# EAGLE board driverMotor (EAGLE 9.6.2)
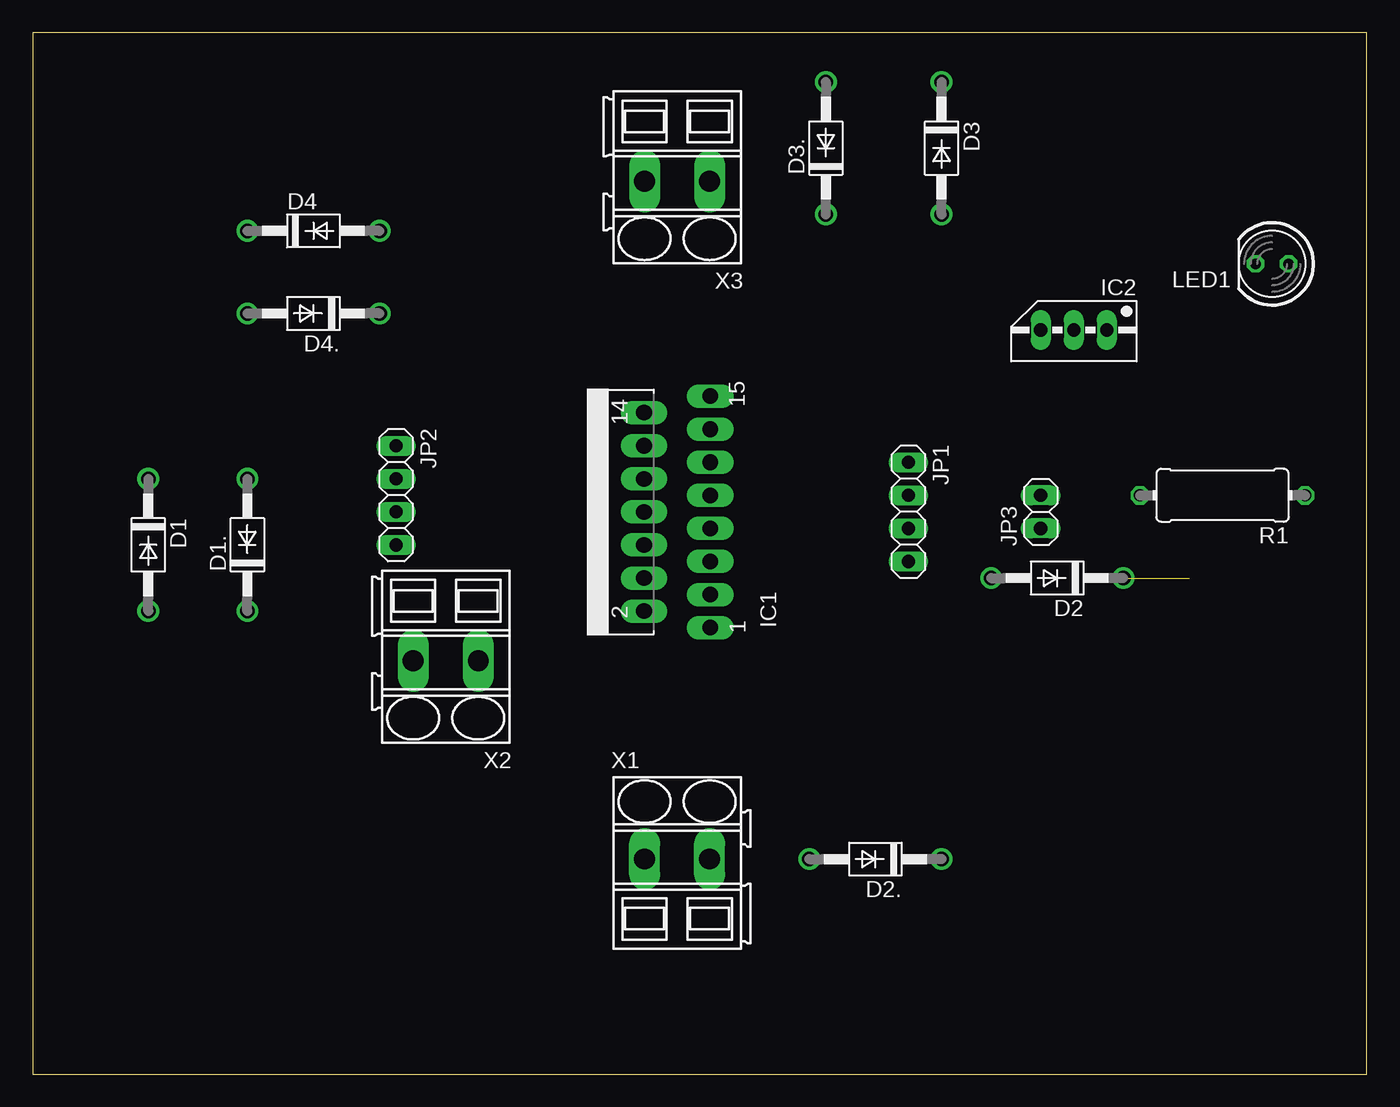
[diagram p0: board, top side]
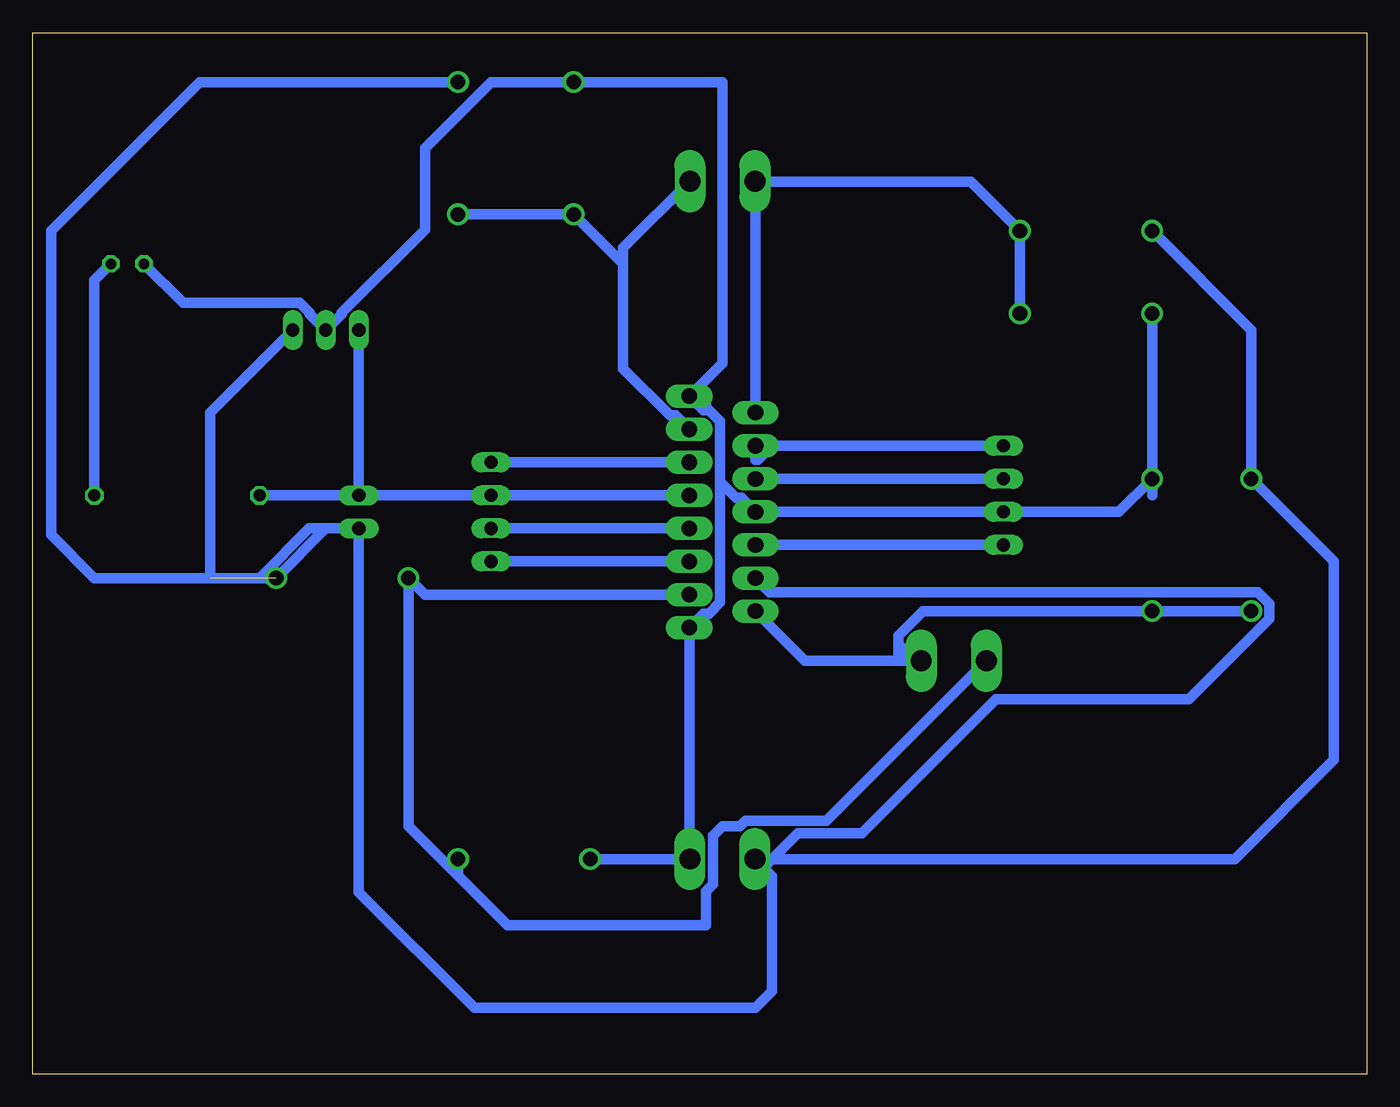
[diagram p1: board, bottom side, seen from below]

Size 102.54 x 80 mm. Coordinates in mm from the lower left corner, seen from the top.
Outline: 0,0 102.54,0 102.54,80 0,80 0,0
Copper layers (1*16): Top 0.035mm / dielectric 1.5mm / Bottom 0.035mm
Design rules "default": minimum track width 6mil, minimum drill 0.35mm, track to track 6mil, track to pad 6mil, pad to pad 6mil, via to via 6mil, smd to smd 6mil, copper to edge 40mil, drill to drill 6mil, minimum pad ring 10mil, minimum via ring 8mil, stop-mask expansion 4mil, vias tented up to drill 0mil, thermal gap 10mil

## Footprints (pad centres in the part's own frame; a part is rotated, then mirrored left to right if it is on the bottom)
DO41-10 = drill 1.118: A 5.08,0; C -5.08,0
MULTIWATT-15 = drill 1.2 long: 1 -8.89,-7.62; 2 -7.62,-2.54; 3 -6.35,-7.62; 4 -5.08,-2.54; 5 -3.81,-7.62; 6 -2.54,-2.54; 7 -1.27,-7.62; 8 0,-2.54; 9 1.27,-7.62; 10 2.54,-2.54; 11 3.81,-7.62; 12 5.08,-2.54; 13 6.35,-7.62; 14 7.62,-2.54; 15 8.89,-7.62
78MXXS = drill 1.016 long: GND 0,-2.54; IN -2.54,-2.54; OUT 2.54,-2.54
1X04 = drill 1.016 long: 1 -3.81,0; 2 -1.27,0; 3 1.27,0; 4 3.81,0
1X02 = drill 1.016 long: 1 -1.27,0; 2 1.27,0
LED5MM = drill 0.813 octagon: A -1.27,0; K 1.27,0
0411/12 = drill 0.914 octagon: 1 -6.35,0; 2 6.35,0
SMKDSP_1,5/2 = drill 1.6 pad 1.8 long: 1 -2.5,0; 2 2.5,0

## Placement (x,y rotation side)
D1  1N4004  [DO41-10]  8.89,40.64 270 top
D1.  1N4004  [DO41-10]  16.51,40.64 90 top
D2  1N4004  [DO41-10]  78.74,38.1 180 top
D2.  1N4004  [DO41-10]  64.77,16.51 180 top
D3  1N4004  [DO41-10]  69.85,71.12 270 top
D3.  1N4004  [DO41-10]  60.96,71.12 90 top
D4  1N4004  [DO41-10]  21.59,64.77 0 top
D4.  1N4004  [DO41-10]  21.59,58.42 180 top
IC1  L298  [MULTIWATT-15]  44.45,43.18 90 top
IC2  [78MXXS]  80.01,54.61 180 top
JP1  [1X04]  67.31,43.18 270 top
JP2  [1X04]  27.94,44.45 270 top
JP3  [1X02]  77.47,43.18 90 top
LED1  [LED5MM]  95.25,62.23 180 top
R1  [0411/12]  91.44,44.45 180 top
X1  SMKDSP_1,5/2  [SMKDSP_1,5/2]  49.53,16.51 0 top
X2  SMKDSP_1,5/2  [SMKDSP_1,5/2]  31.75,31.75 180 top
X3  SMKDSP_1,5/2  [SMKDSP_1,5/2]  49.53,68.58 180 top

## Library data of the parts
D1 D1. D2 D2. D3 D3. D4 D4. = diode
IC1 = st-microelectronics
IC2 = v-reg
JP1-JP3 = pinhead
LED1 = led
R1 = resistor
X1-X3 = con-phoenix-smkdsp; MF: FARNELL; MPN: 1733570; OC_FARNELL: 3041244; OC_NEWARK: 69C8588

## Nets
+5V: IC1.9 IC2.OUT JP1.2 JP3.2 R1.2
ENABLE_A: IC1.6 JP2.4
ENABLE_B: IC1.11 JP1.1
GND: D1..A D2..A D3..A D4..A IC1.1 IC1.8 IC1.15 IC2.GND JP2.3 LED1.K X1.2
INPUT1: IC1.5 JP1.4
INPUT2: IC1.7 JP1.3
INPUT3: IC1.10 JP2.2
INPUT4: IC1.12 JP2.1
LED: LED1.A R1.1
MOTOR1_1: D1..C D1.A IC1.2 X2.1
MOTOR1_2: D2..C D2.A IC1.3 X2.2
MOTOR2_1: D3..C D3.A IC1.13 X3.1
MOTOR2_2: D4..C D4.A IC1.14 X3.2
VS: D1.C D2.C D3.C D4.C IC1.4 IC2.IN JP3.1 X1.1

## Tracks (layer width: path | path; a pad name or v marks a point on that pad's centre or on a via)
+5V
  Bottom 0.813: JP3.2 R1.2 | IC2.OUT JP3.2 | IC1.9 JP1.2 JP3.2
ENABLE_A
  Bottom 0.813: JP2.4 IC1.6
ENABLE_B
  Bottom 0.813: JP1.1 IC1.11
GND
  Bottom 0.813: D2..A X1.2 52.07,16.55 IC1.1 50.99,35.37 50.57,35.37 49.71,36.23 49.71,45.48 | 50.57,50.99 50.8,51.22 50.8,52.07 IC1.15 | 53.34,52.07 IC1.15 | IC1.15 49.53,54.61 49.53,76.2 D3..A 67.31,76.2 72.39,71.12 72.39,64.86 78.79,58.46 78.79,58.37 IC2.GND 81.23,58.37 81.23,58.46 82,59.23 90.98,59.23 LED1.K | D1..A 19.05,43.18 JP2.3 IC1.8 48.07,44.26 48.49,44.26 49.71,45.48 | D4..A D1..A | 16.51,44.45 D1..A | 50.57,50.99 49.71,50.13 49.71,45.48 | IC1.15 50.99,50.99 50.57,50.99
INPUT1
  Bottom 0.813: JP1.4 IC1.5
INPUT2
  Bottom 0.813: JP1.3 IC1.7
INPUT3
  Bottom 0.813: JP2.2 IC1.10
INPUT4
  Bottom 0.813: JP2.1 45.72,48.26 46.8,47.18 46.99,47.18 IC1.12
LED
  Bottom 0.813: LED1.A 97.79,60.96 R1.1
MOTOR1_1
  Bottom 0.813: D1.A D1..C 34.13,35.56 36.01,33.68 36.01,33.02 | 36.01,33.02 36.01,31.75 | 36.01,33.02 34.74,31.75 X2.1 43.18,31.75 IC1.2
MOTOR1_2
  Bottom 0.813: IC1.3 72.39,36.83 D2.A 73.66,19.05 69.85,15.24 | 69.85,15.24 D2..C | X2.2 41.53,19.47 47.76,19.47 48.18,19.05 49.53,19.05 50.27,18.31 50.27,14.58 50.8,14.05 50.8,11.43 66.04,11.43 69.85,15.24
MOTOR2_1
  Bottom 0.813: X3.1 57.15,63.46 57.15,62.23 | IC1.13 53.15,50.61 53.57,50.61 57.15,54.19 57.15,62.23 | D3.A D3..C 57.15,62.23
MOTOR2_2
  Bottom 0.813: D4..C D4.A 30.44,68.54 46.99,68.54 | X3.2 46.99,68.54 | 46.99,68.54 IC1.14
VS  (1 unrouted)
  Bottom 0.813: D3.C 89.69,76.2 101.12,64.77 101.12,41.43 97.79,38.1 85.09,38.1 | IC2.IN 88.9,50.8 88.9,38.1 | JP3.1 77.47,13.97 68.58,5.08 46.99,5.08 45.72,6.35 45.72,15.2 X1.1 | JP3.1 80.01,41.91 D2.C 85.09,38.1 | JP3.1 81.28,41.91 85.09,38.1 | X1.1 10.16,16.51 2.54,24.13 2.54,39.37 D1.C 8.89,57.15 D4.C | IC1.4 45.91,37.02 8.37,37.02 7.49,36.14 7.49,34.98 13.68,28.79 28.52,28.79 38.81,18.5 43.73,18.5 46.99,15.24 47.03,15.28 X1.1